# EAGLE board CCS811 BME280 Panel (EAGLE 7.7.0), part 1 of 2
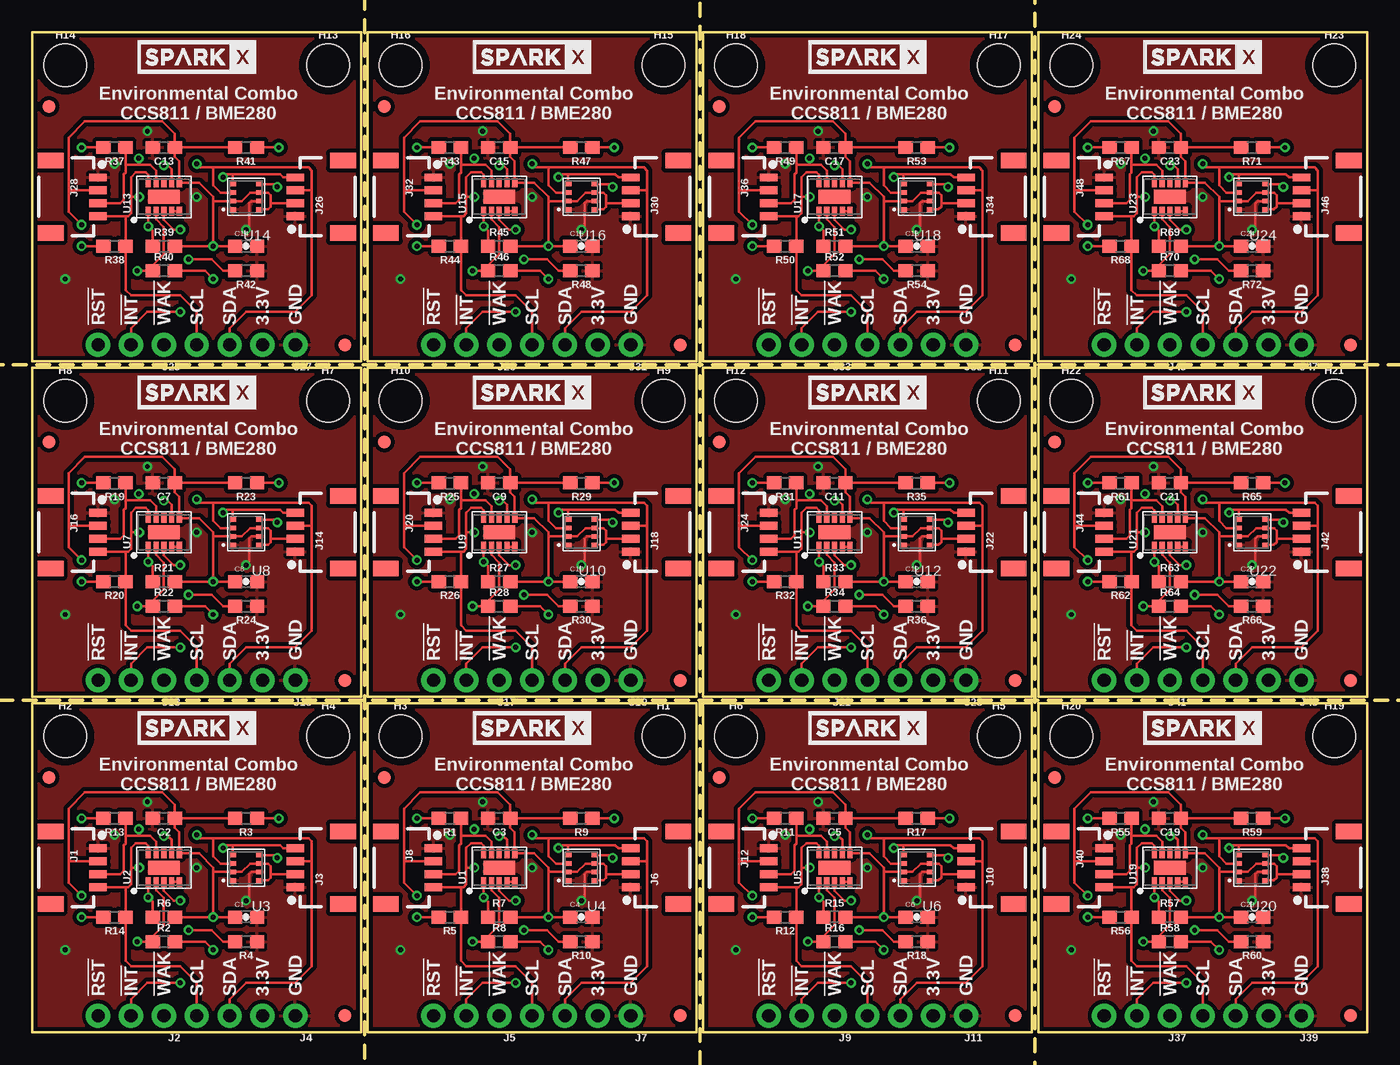
[diagram p0: board, top side]
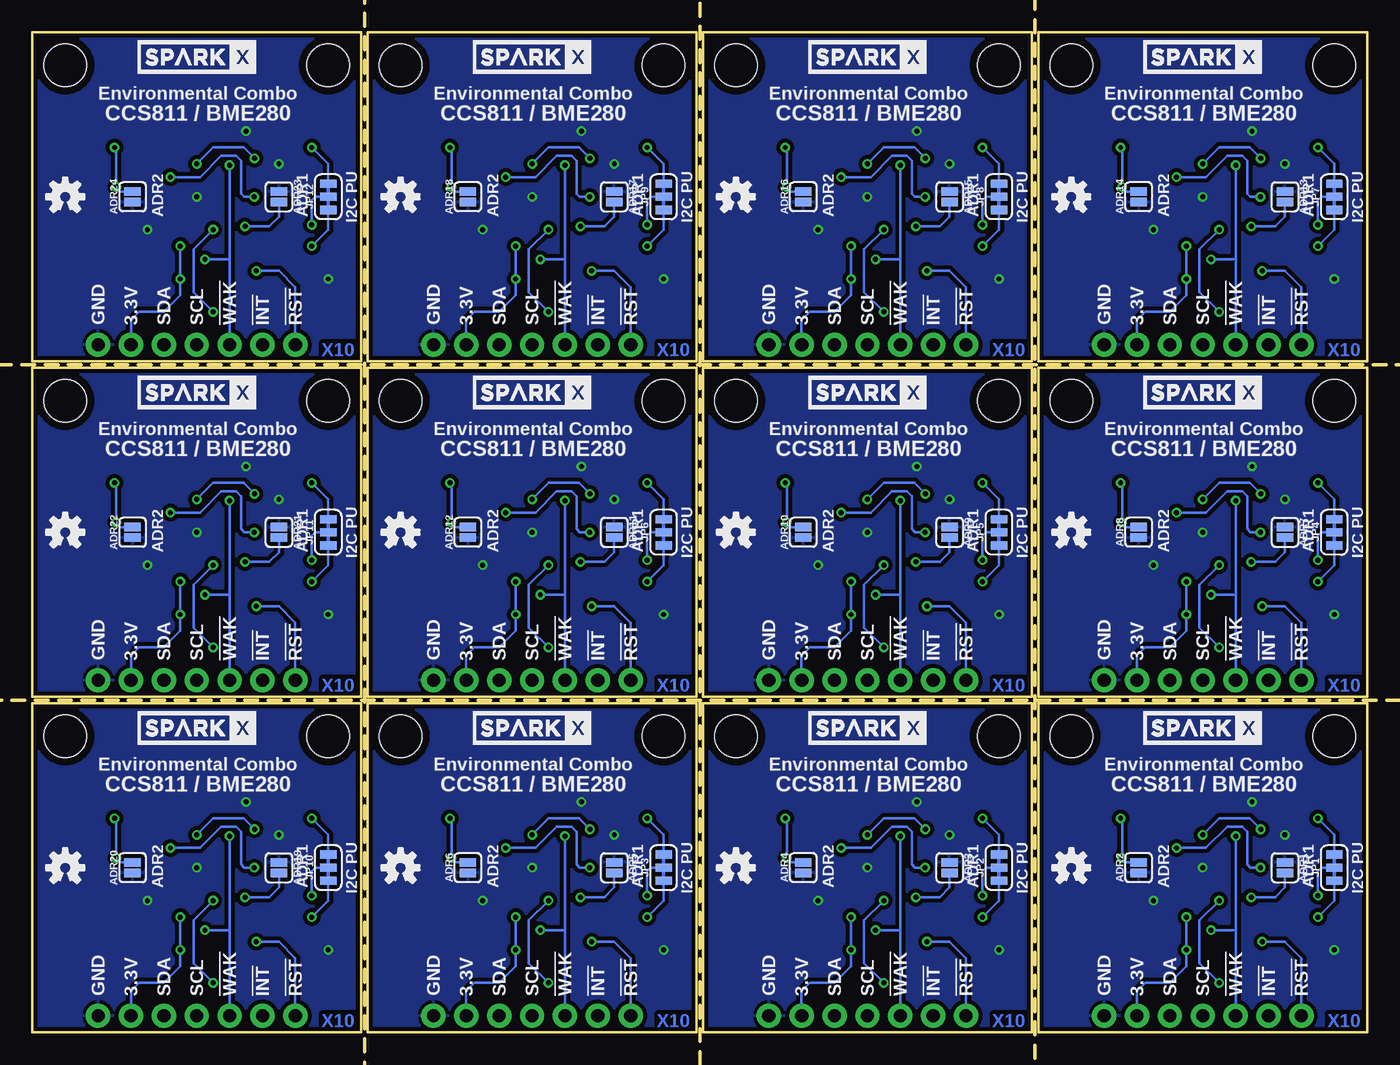
[diagram p1: board, bottom side, seen from below]

Size 103.12 x 77.22 mm. Coordinates in mm from the lower left corner, seen from the top.
Outline: 0,0 0,25.4 25.4,25.4 25.4,0 0,0
Outline: 25.91,0 25.91,25.4 51.31,25.4 51.31,0 25.91,0
Outline: 51.82,0 51.82,25.4 77.22,25.4 77.22,0 51.82,0
Outline: 0,25.91 0,51.31 25.4,51.31 25.4,25.91 0,25.91
Outline: 25.91,25.91 25.91,51.31 51.31,51.31 51.31,25.91 25.91,25.91
Outline: 51.82,25.91 51.82,51.31 77.22,51.31 77.22,25.91 51.82,25.91
Outline: 0,51.82 0,77.22 25.4,77.22 25.4,51.82 0,51.82
Outline: 25.91,51.82 25.91,77.22 51.31,77.22 51.31,51.82 25.91,51.82
Outline: 51.82,51.82 51.82,77.22 77.22,77.22 77.22,51.82 51.82,51.82
Outline: 77.72,0 77.72,25.4 103.12,25.4 103.12,0 77.72,0
Outline: 77.72,25.91 77.72,51.31 103.12,51.31 103.12,25.91 77.72,25.91
Outline: 77.72,51.82 77.72,77.22 103.12,77.22 103.12,51.82 77.72,51.82
Copper layers (1*16): Top 0.035mm / dielectric 1.5mm / Bottom 0.035mm
Design rules "SparkFun-2-layer-TIGHT": minimum track width 7mil, minimum drill 15mil, track to track 7mil, track to pad 7mil, pad to pad 7mil, via to via 7mil, smd to smd 7mil, copper to edge 7mil, drill to drill 7mil, minimum pad ring 7mil, minimum via ring 7mil, stop-mask expansion 4mil, vias tented up to drill 25mil, thermal gap 10mil
Milling: 320 lines

## Footprints (pad centres in the part's own frame; a part is rotated, then mirrored left to right if it is on the bottom)
SMT-JUMPER_2_NO_SILK = smd 0.635 x 1.27: 1 -0.406,0; 2 0.406,0
0603-CAP = smd 1.1 x 1: 1 -0.85,0; 2 0.85,0
0603 = smd 1.1 x 1: 1 -0.85,0; 2 0.85,0
FIDUCIAL-1X2 = smd 1 x 1: 1 0,0
STAND-OFF = hole 3.302: 0,0
1X04_1MM_RA = smd 0.6 x 1.35: 1 -1.5,0; 2 -0.5,0; 3 0.5,0; 4 1.5,0 | smd 1.2 x 2: NC1 2.8,-3.675; NC2 -2.8,-3.675
1X03_NO_SILK = drill 1.016 pad 1.88: 1 0,0; 2 2.54,0; 3 5.08,0
1X04_NO_SILK = drill 1.016 pad 1.88: 1 0,0; 2 2.54,0; 3 5.08,0; 4 7.62,0
SMT-JUMPER_3_2-NC_TRACE_SILK = smd 0.635 x 1.27: 1 -1.016,0; 2 0,0; 3 1.016,0
LGA10 = smd 0.7 x 0.4: 1 -1.1,1.2; 2 -1.1,0.6; 3 -1.1,0; 4 -1.1,-0.6; 5 -1.1,-1.2; 6 1.1,-1.2; 7 1.1,-0.6; 8 1.1,0; 9 1.1,0.6; 10 1.1,1.2 | smd 1.1 x 2.45: EP 0,0
BME280_LGA = smd 0.5 x 0.35: 1 1.025,0.975; 2 1.025,0.325; 3 1.025,-0.325; 4 1.025,-0.975; 5 -1.025,-0.975; 6 -1.025,-0.325; 7 -1.025,0.325; 8 -1.025,0.975

## Placement (x,y rotation side)
ADR1  [SMT-JUMPER_2_NO_SILK]  6.35,12.7 270 bottom
ADR2  [SMT-JUMPER_2_NO_SILK]  17.65,12.7 90 bottom
ADR3  [SMT-JUMPER_2_NO_SILK]  32.26,12.7 270 bottom
ADR4  [SMT-JUMPER_2_NO_SILK]  43.56,12.7 90 bottom
ADR5  [SMT-JUMPER_2_NO_SILK]  58.17,12.7 270 bottom
ADR6  [SMT-JUMPER_2_NO_SILK]  69.47,12.7 90 bottom
ADR7  [SMT-JUMPER_2_NO_SILK]  6.35,38.61 270 bottom
ADR8  [SMT-JUMPER_2_NO_SILK]  17.65,38.61 90 bottom
ADR9  [SMT-JUMPER_2_NO_SILK]  32.26,38.61 270 bottom
ADR10  [SMT-JUMPER_2_NO_SILK]  43.56,38.61 90 bottom
ADR11  [SMT-JUMPER_2_NO_SILK]  58.17,38.61 270 bottom
ADR12  [SMT-JUMPER_2_NO_SILK]  69.47,38.61 90 bottom
ADR13  [SMT-JUMPER_2_NO_SILK]  6.35,64.52 270 bottom
ADR14  [SMT-JUMPER_2_NO_SILK]  17.65,64.52 90 bottom
ADR15  [SMT-JUMPER_2_NO_SILK]  32.26,64.52 270 bottom
ADR16  [SMT-JUMPER_2_NO_SILK]  43.56,64.52 90 bottom
ADR17  [SMT-JUMPER_2_NO_SILK]  58.17,64.52 270 bottom
ADR18  [SMT-JUMPER_2_NO_SILK]  69.47,64.52 90 bottom
ADR19  [SMT-JUMPER_2_NO_SILK]  84.07,12.7 270 bottom
ADR20  [SMT-JUMPER_2_NO_SILK]  95.38,12.7 90 bottom
ADR21  [SMT-JUMPER_2_NO_SILK]  84.07,38.61 270 bottom
ADR22  [SMT-JUMPER_2_NO_SILK]  95.38,38.61 90 bottom
ADR23  [SMT-JUMPER_2_NO_SILK]  84.07,64.52 270 bottom
ADR24  [SMT-JUMPER_2_NO_SILK]  95.38,64.52 90 bottom
C1  0.1uF  [0603-CAP]  16.51,8.89 0 top
C2  1.0uF  [0603]  10.16,16.51 180 top
C3  1.0uF  [0603]  36.07,16.51 180 top
C4  0.1uF  [0603-CAP]  42.42,8.89 0 top
C5  1.0uF  [0603]  61.98,16.51 180 top
C6  0.1uF  [0603-CAP]  68.33,8.89 0 top
C7  1.0uF  [0603]  10.16,42.42 180 top
C8  0.1uF  [0603-CAP]  16.51,34.8 0 top
C9  1.0uF  [0603]  36.07,42.42 180 top
C10  0.1uF  [0603-CAP]  42.42,34.8 0 top
C11  1.0uF  [0603]  61.98,42.42 180 top
C12  0.1uF  [0603-CAP]  68.33,34.8 0 top
C13  1.0uF  [0603]  10.16,68.33 180 top
C14  0.1uF  [0603-CAP]  16.51,60.71 0 top
C15  1.0uF  [0603]  36.07,68.33 180 top
C16  0.1uF  [0603-CAP]  42.42,60.71 0 top
C17  1.0uF  [0603]  61.98,68.33 180 top
C18  0.1uF  [0603-CAP]  68.33,60.71 0 top
C19  1.0uF  [0603]  87.88,16.51 180 top
C20  0.1uF  [0603-CAP]  94.23,8.89 0 top
C21  1.0uF  [0603]  87.88,42.42 180 top
C22  0.1uF  [0603-CAP]  94.23,34.8 0 top
C23  1.0uF  [0603]  87.88,68.33 180 top
C24  0.1uF  [0603-CAP]  94.23,60.71 0 top
FD1  FIDUCIAL1X2  [FIDUCIAL-1X2]  1.27,19.68 0 top
FD2  FIDUCIAL1X2  [FIDUCIAL-1X2]  24.13,1.27 0 top
FD3  FIDUCIAL1X2  [FIDUCIAL-1X2]  27.18,19.68 0 top
FD4  FIDUCIAL1X2  [FIDUCIAL-1X2]  50.04,1.27 0 top
FD5  FIDUCIAL1X2  [FIDUCIAL-1X2]  53.09,19.68 0 top
FD6  FIDUCIAL1X2  [FIDUCIAL-1X2]  75.95,1.27 0 top
FD7  FIDUCIAL1X2  [FIDUCIAL-1X2]  1.27,45.59 0 top
FD8  FIDUCIAL1X2  [FIDUCIAL-1X2]  24.13,27.18 0 top
FD9  FIDUCIAL1X2  [FIDUCIAL-1X2]  27.18,45.59 0 top
FD10  FIDUCIAL1X2  [FIDUCIAL-1X2]  50.04,27.18 0 top
FD11  FIDUCIAL1X2  [FIDUCIAL-1X2]  53.09,45.59 0 top
FD12  FIDUCIAL1X2  [FIDUCIAL-1X2]  75.95,27.18 0 top
FD13  FIDUCIAL1X2  [FIDUCIAL-1X2]  1.27,71.5 0 top
FD14  FIDUCIAL1X2  [FIDUCIAL-1X2]  24.13,53.09 0 top
FD15  FIDUCIAL1X2  [FIDUCIAL-1X2]  27.18,71.5 0 top
FD16  FIDUCIAL1X2  [FIDUCIAL-1X2]  50.04,53.09 0 top
FD17  FIDUCIAL1X2  [FIDUCIAL-1X2]  53.09,71.5 0 top
FD18  FIDUCIAL1X2  [FIDUCIAL-1X2]  75.95,53.09 0 top
FD19  FIDUCIAL1X2  [FIDUCIAL-1X2]  78.99,19.68 0 top
FD20  FIDUCIAL1X2  [FIDUCIAL-1X2]  101.85,1.27 0 top
FD21  FIDUCIAL1X2  [FIDUCIAL-1X2]  78.99,45.59 0 top
FD22  FIDUCIAL1X2  [FIDUCIAL-1X2]  101.85,27.18 0 top
FD23  FIDUCIAL1X2  [FIDUCIAL-1X2]  78.99,71.5 0 top
FD24  FIDUCIAL1X2  [FIDUCIAL-1X2]  101.85,53.09 0 top
H1  STAND-OFF  [STAND-OFF]  48.77,22.86 0 top
H2  STAND-OFF  [STAND-OFF]  2.54,22.86 0 top
H3  STAND-OFF  [STAND-OFF]  28.45,22.86 0 top
H4  STAND-OFF  [STAND-OFF]  22.86,22.86 0 top
H5  STAND-OFF  [STAND-OFF]  74.68,22.86 0 top
H6  STAND-OFF  [STAND-OFF]  54.36,22.86 0 top
H7  STAND-OFF  [STAND-OFF]  22.86,48.77 0 top
H8  STAND-OFF  [STAND-OFF]  2.54,48.77 0 top
H9  STAND-OFF  [STAND-OFF]  48.77,48.77 0 top
H10  STAND-OFF  [STAND-OFF]  28.45,48.77 0 top
H11  STAND-OFF  [STAND-OFF]  74.68,48.77 0 top
H12  STAND-OFF  [STAND-OFF]  54.36,48.77 0 top
H13  STAND-OFF  [STAND-OFF]  22.86,74.68 0 top
H14  STAND-OFF  [STAND-OFF]  2.54,74.68 0 top
H15  STAND-OFF  [STAND-OFF]  48.77,74.68 0 top
H16  STAND-OFF  [STAND-OFF]  28.45,74.68 0 top
H17  STAND-OFF  [STAND-OFF]  74.68,74.68 0 top
H18  STAND-OFF  [STAND-OFF]  54.36,74.68 0 top
H19  STAND-OFF  [STAND-OFF]  100.58,22.86 0 top
H20  STAND-OFF  [STAND-OFF]  80.26,22.86 0 top
H21  STAND-OFF  [STAND-OFF]  100.58,48.77 0 top
H22  STAND-OFF  [STAND-OFF]  80.26,48.77 0 top
H23  STAND-OFF  [STAND-OFF]  100.58,74.68 0 top
H24  STAND-OFF  [STAND-OFF]  80.26,74.68 0 top
J1  JST  [1X04_1MM_RA]  5.08,12.7 270 top
J2  CCS811 Options  [1X03_NO_SILK]  10.16,1.27 180 top
J3  JST  [1X04_1MM_RA]  20.32,12.7 90 top
J4  PTH  [1X04_NO_SILK]  20.32,1.27 180 top
J5  CCS811 Options  [1X03_NO_SILK]  36.07,1.27 180 top
J6  JST  [1X04_1MM_RA]  46.23,12.7 90 top
J7  PTH  [1X04_NO_SILK]  46.23,1.27 180 top
J8  JST  [1X04_1MM_RA]  30.99,12.7 270 top
J9  CCS811 Options  [1X03_NO_SILK]  61.98,1.27 180 top
J10  JST  [1X04_1MM_RA]  72.14,12.7 90 top
J11  PTH  [1X04_NO_SILK]  72.14,1.27 180 top
J12  JST  [1X04_1MM_RA]  56.9,12.7 270 top
J13  CCS811 Options  [1X03_NO_SILK]  10.16,27.18 180 top
J14  JST  [1X04_1MM_RA]  20.32,38.61 90 top
J15  PTH  [1X04_NO_SILK]  20.32,27.18 180 top
J16  JST  [1X04_1MM_RA]  5.08,38.61 270 top
J17  CCS811 Options  [1X03_NO_SILK]  36.07,27.18 180 top
J18  JST  [1X04_1MM_RA]  46.23,38.61 90 top
J19  PTH  [1X04_NO_SILK]  46.23,27.18 180 top
J20  JST  [1X04_1MM_RA]  30.99,38.61 270 top
J21  CCS811 Options  [1X03_NO_SILK]  61.98,27.18 180 top
J22  JST  [1X04_1MM_RA]  72.14,38.61 90 top
J23  PTH  [1X04_NO_SILK]  72.14,27.18 180 top
J24  JST  [1X04_1MM_RA]  56.9,38.61 270 top
J25  CCS811 Options  [1X03_NO_SILK]  10.16,53.09 180 top
J26  JST  [1X04_1MM_RA]  20.32,64.52 90 top
J27  PTH  [1X04_NO_SILK]  20.32,53.09 180 top
J28  JST  [1X04_1MM_RA]  5.08,64.52 270 top
J29  CCS811 Options  [1X03_NO_SILK]  36.07,53.09 180 top
J30  JST  [1X04_1MM_RA]  46.23,64.52 90 top
J31  PTH  [1X04_NO_SILK]  46.23,53.09 180 top
J32  JST  [1X04_1MM_RA]  30.99,64.52 270 top
J33  CCS811 Options  [1X03_NO_SILK]  61.98,53.09 180 top
J34  JST  [1X04_1MM_RA]  72.14,64.52 90 top
J35  PTH  [1X04_NO_SILK]  72.14,53.09 180 top
J36  JST  [1X04_1MM_RA]  56.9,64.52 270 top
J37  CCS811 Options  [1X03_NO_SILK]  87.88,1.27 180 top
J38  JST  [1X04_1MM_RA]  98.04,12.7 90 top
J39  PTH  [1X04_NO_SILK]  98.04,1.27 180 top
J40  JST  [1X04_1MM_RA]  82.8,12.7 270 top
J41  CCS811 Options  [1X03_NO_SILK]  87.88,27.18 180 top
J42  JST  [1X04_1MM_RA]  98.04,38.61 90 top
J43  PTH  [1X04_NO_SILK]  98.04,27.18 180 top
J44  JST  [1X04_1MM_RA]  82.8,38.61 270 top
J45  CCS811 Options  [1X03_NO_SILK]  87.88,53.09 180 top
J46  JST  [1X04_1MM_RA]  98.04,64.52 90 top
J47  PTH  [1X04_NO_SILK]  98.04,53.09 180 top
J48  JST  [1X04_1MM_RA]  82.8,64.52 270 top
JP1  [SMT-JUMPER_3_2-NC_TRACE_SILK]  2.54,12.7 90 bottom
JP2  [SMT-JUMPER_3_2-NC_TRACE_SILK]  28.45,12.7 90 bottom
JP3  [SMT-JUMPER_3_2-NC_TRACE_SILK]  54.36,12.7 90 bottom
JP4  [SMT-JUMPER_3_2-NC_TRACE_SILK]  2.54,38.61 90 bottom
JP5  [SMT-JUMPER_3_2-NC_TRACE_SILK]  28.45,38.61 90 bottom
JP6  [SMT-JUMPER_3_2-NC_TRACE_SILK]  54.36,38.61 90 bottom
JP7  [SMT-JUMPER_3_2-NC_TRACE_SILK]  2.54,64.52 90 bottom
JP8  [SMT-JUMPER_3_2-NC_TRACE_SILK]  28.45,64.52 90 bottom
JP9  [SMT-JUMPER_3_2-NC_TRACE_SILK]  54.36,64.52 90 bottom
JP10  [SMT-JUMPER_3_2-NC_TRACE_SILK]  80.26,12.7 90 bottom
JP11  [SMT-JUMPER_3_2-NC_TRACE_SILK]  80.26,38.61 90 bottom
JP12  [SMT-JUMPER_3_2-NC_TRACE_SILK]  80.26,64.52 90 bottom
LOGO1  OSHW-LOGOS  [OSHW-LOGO-S]  48.77,12.7 0 bottom
LOGO2  OSHW-LOGOS  [OSHW-LOGO-S]  74.68,12.7 0 bottom
LOGO3  OSHW-LOGOS  [OSHW-LOGO-S]  22.86,38.61 0 bottom
LOGO4  OSHW-LOGOS  [OSHW-LOGO-S]  22.86,12.7 0 bottom
LOGO5  OSHW-LOGOS  [OSHW-LOGO-S]  48.77,38.61 0 bottom
LOGO6  OSHW-LOGOS  [OSHW-LOGO-S]  74.68,38.61 0 bottom
LOGO7  OSHW-LOGOS  [OSHW-LOGO-S]  22.86,64.52 0 bottom
LOGO8  OSHW-LOGOS  [OSHW-LOGO-S]  48.77,64.52 0 bottom
LOGO9  OSHW-LOGOS  [OSHW-LOGO-S]  74.68,64.52 0 bottom
LOGO10  OSHW-LOGOS  [OSHW-LOGO-S]  100.58,12.7 0 bottom
LOGO11  OSHW-LOGOS  [OSHW-LOGO-S]  100.58,38.61 0 bottom
LOGO12  OSHW-LOGOS  [OSHW-LOGO-S]  100.58,64.52 0 bottom
R1  4.7k  [0603]  32.26,16.51 180 top
R2  4.7k  [0603]  10.16,6.99 0 top
R3  100k  [0603]  16.51,16.51 180 top
R4  100k  [0603]  16.51,6.99 180 top
R5  4.7k  [0603]  32.26,8.89 180 top
R6  100k  [0603]  10.16,8.89 0 top
R7  100k  [0603]  36.07,8.89 0 top
R8  4.7k  [0603]  36.07,6.99 0 top
R9  100k  [0603]  42.42,16.51 180 top
R10  100k  [0603]  42.42,6.99 180 top
R11  4.7k  [0603]  58.17,16.51 180 top
R12  4.7k  [0603]  58.17,8.89 180 top
R13  4.7k  [0603]  6.35,16.51 180 top
R14  4.7k  [0603]  6.35,8.89 180 top
R15  100k  [0603]  61.98,8.89 0 top
R16  4.7k  [0603]  61.98,6.99 0 top
R17  100k  [0603]  68.33,16.51 180 top
R18  100k  [0603]  68.33,6.99 180 top
R19  4.7k  [0603]  6.35,42.42 180 top
R20  4.7k  [0603]  6.35,34.8 180 top
R21  100k  [0603]  10.16,34.8 0 top
R22  4.7k  [0603]  10.16,32.89 0 top
R23  100k  [0603]  16.51,42.42 180 top
R24  100k  [0603]  16.51,32.89 180 top
R25  4.7k  [0603]  32.26,42.42 180 top
R26  4.7k  [0603]  32.26,34.8 180 top
R27  100k  [0603]  36.07,34.8 0 top
R28  4.7k  [0603]  36.07,32.89 0 top
R29  100k  [0603]  42.42,42.42 180 top
R30  100k  [0603]  42.42,32.89 180 top
R31  4.7k  [0603]  58.17,42.42 180 top
R32  4.7k  [0603]  58.17,34.8 180 top
R33  100k  [0603]  61.98,34.8 0 top
R34  4.7k  [0603]  61.98,32.89 0 top
R35  100k  [0603]  68.33,42.42 180 top
R36  100k  [0603]  68.33,32.89 180 top
R37  4.7k  [0603]  6.35,68.33 180 top
R38  4.7k  [0603]  6.35,60.71 180 top
R39  100k  [0603]  10.16,60.71 0 top
R40  4.7k  [0603]  10.16,58.8 0 top
R41  100k  [0603]  16.51,68.33 180 top
R42  100k  [0603]  16.51,58.8 180 top
R43  4.7k  [0603]  32.26,68.33 180 top
R44  4.7k  [0603]  32.26,60.71 180 top
R45  100k  [0603]  36.07,60.71 0 top
R46  4.7k  [0603]  36.07,58.8 0 top
R47  100k  [0603]  42.42,68.33 180 top
R48  100k  [0603]  42.42,58.8 180 top
R49  4.7k  [0603]  58.17,68.33 180 top
R50  4.7k  [0603]  58.17,60.71 180 top
R51  100k  [0603]  61.98,60.71 0 top
R52  4.7k  [0603]  61.98,58.8 0 top
R53  100k  [0603]  68.33,68.33 180 top
R54  100k  [0603]  68.33,58.8 180 top
R55  4.7k  [0603]  84.07,16.51 180 top
R56  4.7k  [0603]  84.07,8.89 180 top
R57  100k  [0603]  87.88,8.89 0 top
R58  4.7k  [0603]  87.88,6.99 0 top
R59  100k  [0603]  94.23,16.51 180 top
R60  100k  [0603]  94.23,6.99 180 top
R61  4.7k  [0603]  84.07,42.42 180 top
R62  4.7k  [0603]  84.07,34.8 180 top
R63  100k  [0603]  87.88,34.8 0 top
R64  4.7k  [0603]  87.88,32.89 0 top
R65  100k  [0603]  94.23,42.42 180 top
R66  100k  [0603]  94.23,32.89 180 top
R67  4.7k  [0603]  84.07,68.33 180 top
R68  4.7k  [0603]  84.07,60.71 180 top
R69  100k  [0603]  87.88,60.71 0 top
R70  4.7k  [0603]  87.88,58.8 0 top
R71  100k  [0603]  94.23,68.33 180 top
R72  100k  [0603]  94.23,58.8 180 top
U1  CCS811  [LGA10]  36.07,12.7 90 top
U2  CCS811  [LGA10]  10.16,12.7 90 top
U3  [BME280_LGA]  16.51,12.7 180 top
U4  [BME280_LGA]  42.42,12.7 180 top
U5  CCS811  [LGA10]  61.98,12.7 90 top
U6  [BME280_LGA]  68.33,12.7 180 top
U7  CCS811  [LGA10]  10.16,38.61 90 top
U8  [BME280_LGA]  16.51,38.61 180 top
U9  CCS811  [LGA10]  36.07,38.61 90 top
U10  [BME280_LGA]  42.42,38.61 180 top
U11  CCS811  [LGA10]  61.98,38.61 90 top
U12  [BME280_LGA]  68.33,38.61 180 top
U13  CCS811  [LGA10]  10.16,64.52 90 top
U14  [BME280_LGA]  16.51,64.52 180 top
U15  CCS811  [LGA10]  36.07,64.52 90 top
U16  [BME280_LGA]  42.42,64.52 180 top
U17  CCS811  [LGA10]  61.98,64.52 90 top
U18  [BME280_LGA]  68.33,64.52 180 top
U19  CCS811  [LGA10]  87.88,12.7 90 top
U20  [BME280_LGA]  94.23,12.7 180 top
U21  CCS811  [LGA10]  87.88,38.61 90 top
U22  [BME280_LGA]  94.23,38.61 180 top
U23  CCS811  [LGA10]  87.88,64.52 90 top
U24  [BME280_LGA]  94.23,64.52 180 top
U$1  SPARKX-LOGO4  [SPARKX-MEDIUM]  12.7,23.5 0 top
U$2  SPARKX-LOGO4  [SPARKX-MEDIUM]  12.7,23.5 0 bottom
U$3  SPARKX-LOGO4  [SPARKX-MEDIUM]  38.61,23.5 0 top
U$4  SPARKX-LOGO4  [SPARKX-MEDIUM]  38.61,23.5 0 bottom
U$5  SPARKX-LOGO4  [SPARKX-MEDIUM]  64.52,23.5 0 top
U$6  SPARKX-LOGO4  [SPARKX-MEDIUM]  64.52,23.5 0 bottom
U$7  SPARKX-LOGO4  [SPARKX-MEDIUM]  12.7,49.4 0 top
U$8  SPARKX-LOGO4  [SPARKX-MEDIUM]  12.7,49.4 0 bottom
U$9  SPARKX-LOGO4  [SPARKX-MEDIUM]  38.61,49.4 0 top
U$10  SPARKX-LOGO4  [SPARKX-MEDIUM]  38.61,49.4 0 bottom
U$11  SPARKX-LOGO4  [SPARKX-MEDIUM]  64.52,49.4 0 top
U$12  SPARKX-LOGO4  [SPARKX-MEDIUM]  64.52,49.4 0 bottom
U$13  SPARKX-LOGO4  [SPARKX-MEDIUM]  12.7,75.31 0 top
U$14  SPARKX-LOGO4  [SPARKX-MEDIUM]  12.7,75.31 0 bottom
U$15  SPARKX-LOGO4  [SPARKX-MEDIUM]  38.61,75.31 0 top
U$16  SPARKX-LOGO4  [SPARKX-MEDIUM]  38.61,75.31 0 bottom
U$17  SPARKX-LOGO4  [SPARKX-MEDIUM]  64.52,75.31 0 top
U$18  SPARKX-LOGO4  [SPARKX-MEDIUM]  64.52,75.31 0 bottom
U$19  SPARKX-LOGO4  [SPARKX-MEDIUM]  90.42,23.5 0 top
U$20  SPARKX-LOGO4  [SPARKX-MEDIUM]  90.42,23.5 0 bottom
U$21  SPARKX-LOGO4  [SPARKX-MEDIUM]  90.42,49.4 0 top
U$22  SPARKX-LOGO4  [SPARKX-MEDIUM]  90.42,49.4 0 bottom
U$23  SPARKX-LOGO4  [SPARKX-MEDIUM]  90.42,75.31 0 top
U$24  SPARKX-LOGO4  [SPARKX-MEDIUM]  90.42,75.31 0 bottom

## Library data of the parts
ADR1-ADR24 JP1-JP12 = SparkFun-Jumpers
C1 C4 C6 C8 C10 C12 C14 C16 C18 C20 C22 C24 = SparkFun-Capacitors; PROD_ID: CAP-08604
C2 C3 C5 C7 C9 C11 C13 C15 C17 C19 C21 C23 = SparkFun-Capacitors; PROD_ID: CAP-00868
FD1-FD24 LOGO1-LOGO12 = SparkFun-Aesthetics
H1-H24 = SparkFun-Hardware
J1 J3 J4 J6-J8 J10-J12 J14-J16 J18-J20 J22-J24 J26-J28 J30-J32 J34-J36 J38-J40 J42-J44 J46-J48 U1-U24 U$1-U$24 = SparkX
J2 J5 J9 J13 J17 J21 J25 J29 J33 J37 J41 J45 = SparkFun-Connectors
R1 R2 R5 R8 R11-R14 R16 R19 R20 R22 R25 R26 R28 R31 R32 R34 R37 R38 R40 R43 R44 R46 R49 R50 R52 R55 R56 R58 R61 R62 R64 R67 R68 R70 = SparkFun-Resistors; PROD_ID: RES-07857
R3 R4 R6 R7 R9 R10 R15 R17 R18 R21 R23 R24 R27 R29 R30 R33 R35 R36 R39 R41 R42 R45 R47 R48 R51 R53 R54 R57 R59 R60 R63 R65 R66 R69 R71 R72 = SparkFun-Resistors; PROD_ID: RES-07828

## Nets
3.3V: C1.1 C2.1 J1.2 J3.2 J4.2 JP1.2 R2.2 R3.2 R6.2 U2.6 U3.2 U3.6 U3.8
3.3V1: C3.1 C4.1 J6.2 J7.2 J8.2 JP2.2 R7.2 R8.2 R9.2 U1.6 U4.2 U4.6 U4.8
3.3V2: C5.1 C6.1 J10.2 J11.2 J12.2 JP3.2 R15.2 R16.2 R17.2 U5.6 U6.2 U6.6 U6.8
3.3V3: C7.1 C8.1 J14.2 J15.2 J16.2 JP4.2 R21.2 R22.2 R23.2 U7.6 U8.2 U8.6 U8.8
3.3V4: C9.1 C10.1 J18.2 J19.2 J20.2 JP5.2 R27.2 R28.2 R29.2 U9.6 U10.2 U10.6 U10.8
3.3V5: C11.1 C12.1 J22.2 J23.2 J24.2 JP6.2 R33.2 R34.2 R35.2 U11.6 U12.2 U12.6 U12.8
3.3V6: C13.1 C14.1 J26.2 J27.2 J28.2 JP7.2 R39.2 R40.2 R41.2 U13.6 U14.2 U14.6 U14.8
3.3V7: C15.1 C16.1 J30.2 J31.2 J32.2 JP8.2 R45.2 R46.2 R47.2 U15.6 U16.2 U16.6 U16.8
3.3V8: C17.1 C18.1 J34.2 J35.2 J36.2 JP9.2 R51.2 R52.2 R53.2 U17.6 U18.2 U18.6 U18.8
3.3V9: C19.1 C20.1 J38.2 J39.2 J40.2 JP10.2 R57.2 R58.2 R59.2 U19.6 U20.2 U20.6 U20.8
3.3V10: C21.1 C22.1 J42.2 J43.2 J44.2 JP11.2 R63.2 R64.2 R65.2 U21.6 U22.2 U22.6 U22.8
3.3V11: C23.1 C24.1 J46.2 J47.2 J48.2 JP12.2 R69.2 R70.2 R71.2 U23.6 U24.2 U24.6 U24.8
!INT: J2.2 U2.3
!INT1: J5.2 U1.3
!INT2: J9.2 U5.3
!INT3: J13.2 U7.3
!INT4: J17.2 U9.3
!INT5: J21.2 U11.3
!INT6: J25.2 U13.3
!INT7: J29.2 U15.3
!INT8: J33.2 U17.3
!INT9: J37.2 U19.3
!INT10: J41.2 U21.3
!INT11: J45.2 U23.3
!RST: J2.3 R2.1 U2.2
!RST1: J5.3 R8.1 U1.2
!RST2: J9.3 R16.1 U5.2
!RST3: J13.3 R22.1 U7.2
!RST4: J17.3 R28.1 U9.2
!RST5: J21.3 R34.1 U11.2
!RST6: J25.3 R40.1 U13.2
!RST7: J29.3 R46.1 U15.2
!RST8: J33.3 R52.1 U17.2
!RST9: J37.3 R58.1 U19.2
!RST10: J41.3 R64.1 U21.2
!RST11: J45.3 R70.1 U23.2
!WAKE: J2.1 R4.2 U2.7
!WAKE1: J5.1 R10.2 U1.7
!WAKE2: J9.1 R18.2 U5.7
!WAKE3: J13.1 R24.2 U7.7
!WAKE4: J17.1 R30.2 U9.7
!WAKE5: J21.1 R36.2 U11.7
!WAKE6: J25.1 R42.2 U13.7
!WAKE7: J29.1 R48.2 U15.7
!WAKE8: J33.1 R54.2 U17.7
!WAKE9: J37.1 R60.2 U19.7
!WAKE10: J41.1 R66.2 U21.7
!WAKE11: J45.1 R72.2 U23.7
CCS811_ADDR: ADR1.2 R6.1 U2.1
CCS811_ADDR1: ADR3.2 R7.1 U1.1
CCS811_ADDR2: ADR5.2 R15.1 U5.1
CCS811_ADDR3: ADR7.2 R21.1 U7.1
CCS811_ADDR4: ADR9.2 R27.1 U9.1
CCS811_ADDR5: ADR11.2 R33.1 U11.1
CCS811_ADDR6: ADR13.2 R39.1 U13.1
CCS811_ADDR7: ADR15.2 R45.1 U15.1
CCS811_ADDR8: ADR17.2 R51.1 U17.1
CCS811_ADDR9: ADR19.2 R57.1 U19.1
CCS811_ADDR10: ADR21.2 R63.1 U21.1
CCS811_ADDR11: ADR23.2 R69.1 U23.1
GND: ADR1.1 ADR2.1 C1.2 C2.2 J1.1 J3.1 J4.1 R4.1 U2.EP U3.1 U3.7
GND1: ADR3.1 ADR4.1 C3.2 C4.2 J6.1 J7.1 J8.1 R10.1 U1.EP U4.1 U4.7
GND2: ADR5.1 ADR6.1 C5.2 C6.2 J10.1 J11.1 J12.1 R18.1 U5.EP U6.1 U6.7
GND3: ADR7.1 ADR8.1 C7.2 C8.2 J14.1 J15.1 J16.1 R24.1 U7.EP U8.1 U8.7
GND4: ADR9.1 ADR10.1 C9.2 C10.2 J18.1 J19.1 J20.1 R30.1 U9.EP U10.1 U10.7
GND5: ADR11.1 ADR12.1 C11.2 C12.2 J22.1 J23.1 J24.1 R36.1 U11.EP U12.1 U12.7
GND6: ADR13.1 ADR14.1 C13.2 C14.2 J26.1 J27.1 J28.1 R42.1 U13.EP U14.1 U14.7
GND7: ADR15.1 ADR16.1 C15.2 C16.2 J30.1 J31.1 J32.1 R48.1 U15.EP U16.1 U16.7
GND8: ADR17.1 ADR18.1 C17.2 C18.2 J34.1 J35.1 J36.1 R54.1 U17.EP U18.1 U18.7
GND9: ADR19.1 ADR20.1 C19.2 C20.2 J38.1 J39.1 J40.1 R60.1 U19.EP U20.1 U20.7
GND10: ADR21.1 ADR22.1 C21.2 C22.2 J42.1 J43.1 J44.1 R66.1 U21.EP U22.1 U22.7
GND11: ADR23.1 ADR24.1 C23.2 C24.2 J46.1 J47.1 J48.1 R72.1 U23.EP U24.1 U24.7
N$1: JP2.3 R1.2
N$2: JP2.1 R5.2
N$3: JP3.3 R11.2
N$4: JP1.3 R13.2
N$5: JP1.1 R14.2
N$6: JP3.1 R12.2
N$7: JP4.3 R19.2
N$8: JP4.1 R20.2
N$9: JP5.3 R25.2
N$10: JP5.1 R26.2
N$11: JP6.3 R31.2
N$12: JP6.1 R32.2
N$13: JP7.3 R37.2
N$14: JP7.1 R38.2
N$15: JP8.3 R43.2
N$16: JP8.1 R44.2
N$17: JP9.3 R49.2
N$18: JP9.1 R50.2
N$19: JP10.3 R55.2
N$20: JP10.1 R56.2
N$21: JP11.3 R61.2
N$22: JP11.1 R62.2
N$23: JP12.3 R67.2
N$24: JP12.1 R68.2
NTC_SENSE: U2.4 U2.5
NTC_SENSE1: U1.4 U1.5
NTC_SENSE2: U5.4 U5.5
NTC_SENSE3: U7.4 U7.5
NTC_SENSE4: U9.4 U9.5
NTC_SENSE5: U11.4 U11.5
NTC_SENSE6: U13.4 U13.5
NTC_SENSE7: U15.4 U15.5
NTC_SENSE8: U17.4 U17.5
NTC_SENSE9: U19.4 U19.5
NTC_SENSE10: U21.4 U21.5
NTC_SENSE11: U23.4 U23.5
SCL: J1.4 J3.4 J4.4 R14.1 U2.10 U3.4
SCL1: J6.4 J7.4 J8.4 R5.1 U1.10 U4.4
SCL2: J10.4 J11.4 J12.4 R12.1 U5.10 U6.4
SCL3: J14.4 J15.4 J16.4 R20.1 U7.10 U8.4
SCL4: J18.4 J19.4 J20.4 R26.1 U9.10 U10.4
SCL5: J22.4 J23.4 J24.4 R32.1 U11.10 U12.4
SCL6: J26.4 J27.4 J28.4 R38.1 U13.10 U14.4
SCL7: J30.4 J31.4 J32.4 R44.1 U15.10 U16.4
SCL8: J34.4 J35.4 J36.4 R50.1 U17.10 U18.4
SCL9: J38.4 J39.4 J40.4 R56.1 U19.10 U20.4
SCL10: J42.4 J43.4 J44.4 R62.1 U21.10 U22.4
SCL11: J46.4 J47.4 J48.4 R68.1 U23.10 U24.4
SDA: J1.3 J3.3 J4.3 R13.1 U2.9 U3.3
SDA1: J6.3 J7.3 J8.3 R1.1 U1.9 U4.3
SDA2: J10.3 J11.3 J12.3 R11.1 U5.9 U6.3
SDA3: J14.3 J15.3 J16.3 R19.1 U7.9 U8.3
SDA4: J18.3 J19.3 J20.3 R25.1 U9.9 U10.3
SDA5: J22.3 J23.3 J24.3 R31.1 U11.9 U12.3
SDA6: J26.3 J27.3 J28.3 R37.1 U13.9 U14.3
SDA7: J30.3 J31.3 J32.3 R43.1 U15.9 U16.3
SDA8: J34.3 J35.3 J36.3 R49.1 U17.9 U18.3
SDA9: J38.3 J39.3 J40.3 R55.1 U19.9 U20.3
SDA10: J42.3 J43.3 J44.3 R61.1 U21.9 U22.3
SDA11: J46.3 J47.3 J48.3 R67.1 U23.9 U24.3
SDO/ADR: ADR2.2 R3.1 U3.5
SDO/ADR1: ADR4.2 R9.1 U4.5
SDO/ADR2: ADR6.2 R17.1 U6.5
SDO/ADR3: ADR8.2 R23.1 U8.5
SDO/ADR4: ADR10.2 R29.1 U10.5
SDO/ADR5: ADR12.2 R35.1 U12.5
SDO/ADR6: ADR14.2 R41.1 U14.5
SDO/ADR7: ADR16.2 R47.1 U16.5
SDO/ADR8: ADR18.2 R53.1 U18.5
SDO/ADR9: ADR20.2 R59.1 U20.5
SDO/ADR10: ADR22.2 R65.1 U22.5
SDO/ADR11: ADR24.2 R71.1 U24.5